# Altium PCB PowerModule.PcbDoc
Units mm, origin at the board's own origin, x right, y up, seen from the top; angles counter-clockwise.
Board outline 44.35 x 31.02 mm, 4 copper layers (Top Layer, GND, Power, Bottom Layer), stack 1.57 mm thick; 73 components, 36 nets, 299 pads, 922 vias.
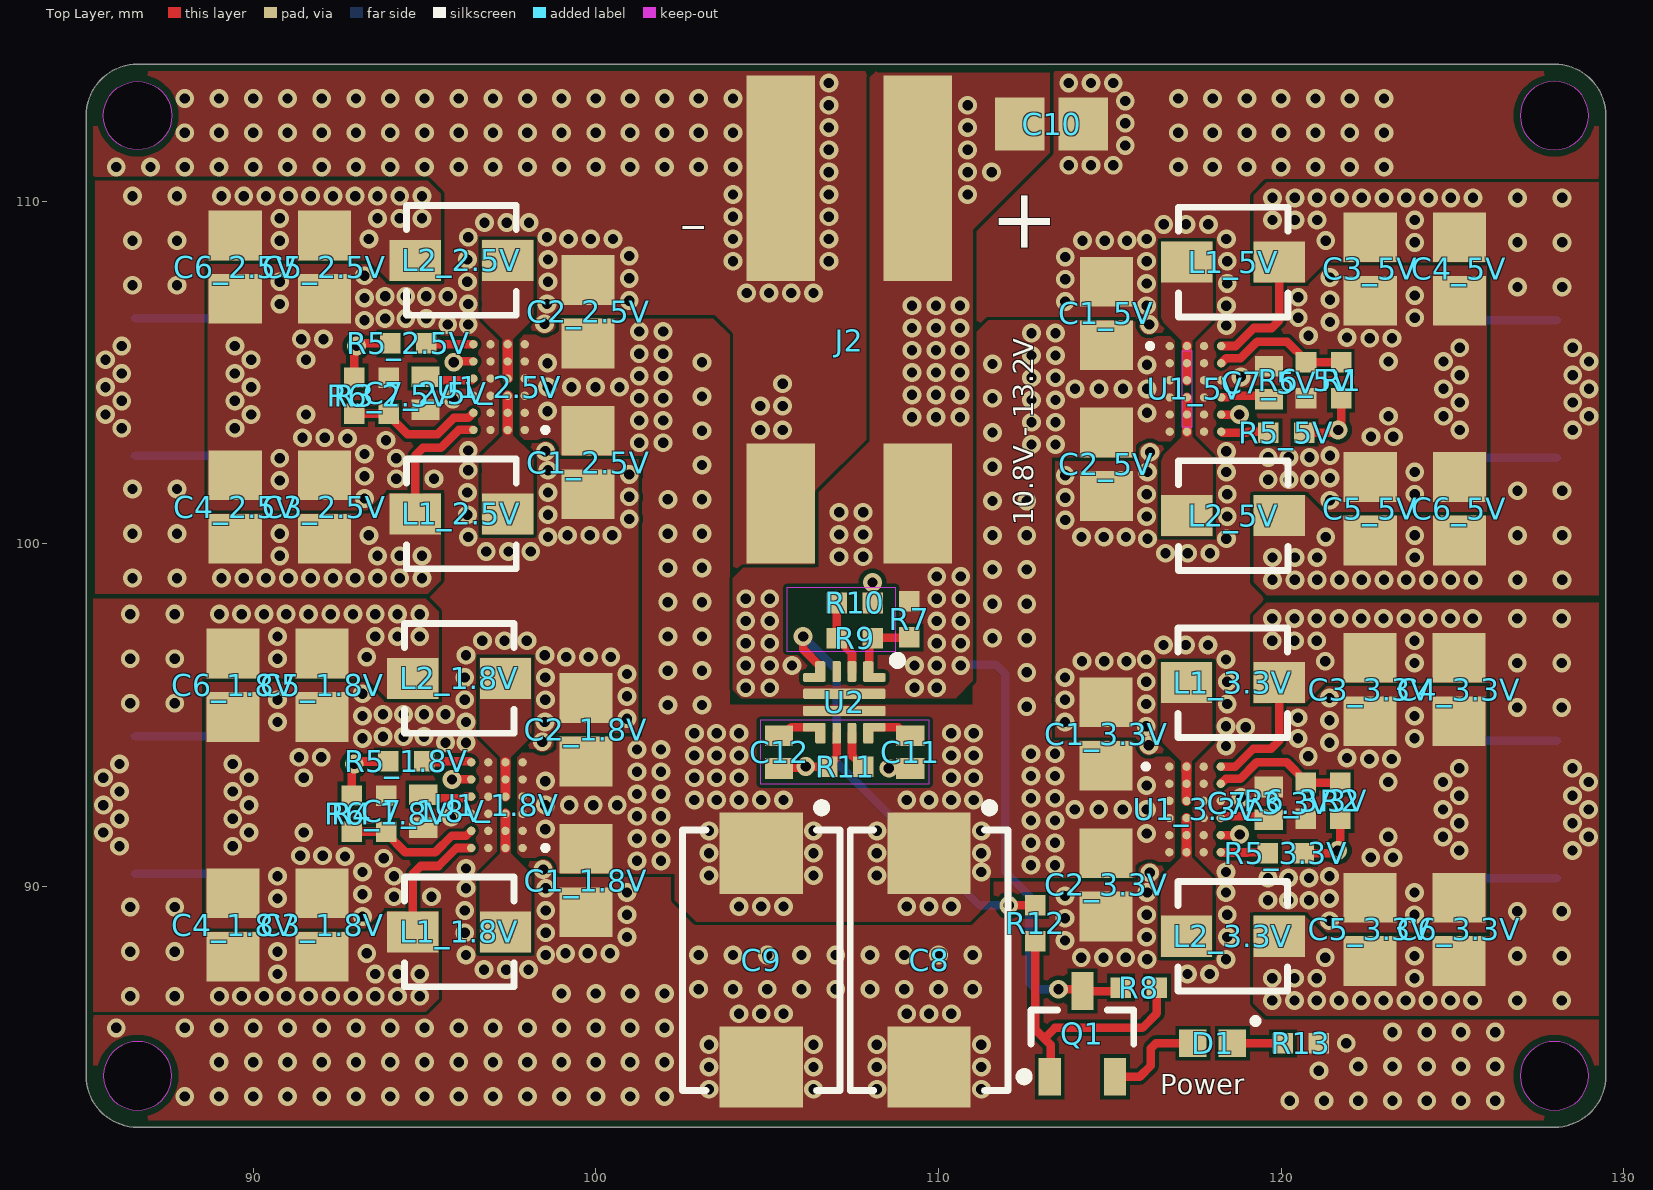
[diagram p0: Top Layer view]
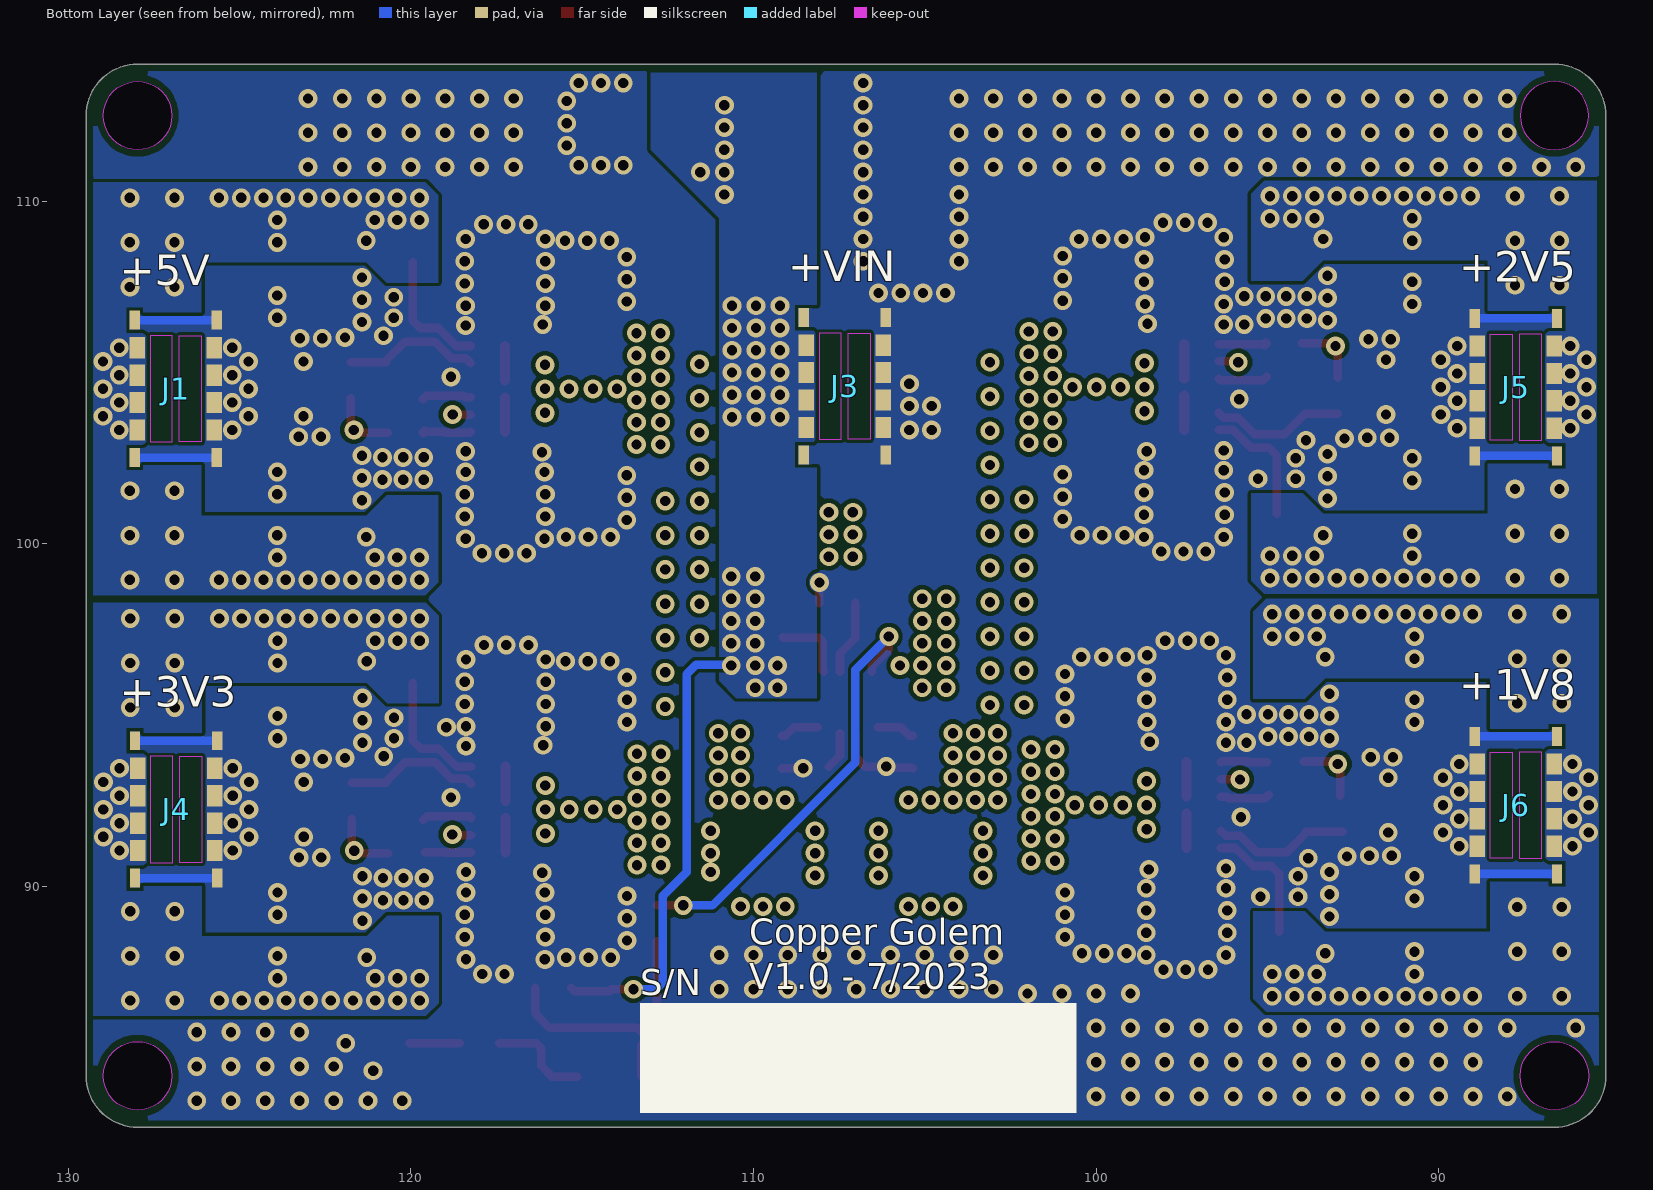
[diagram p1: Bottom Layer view, seen from below]
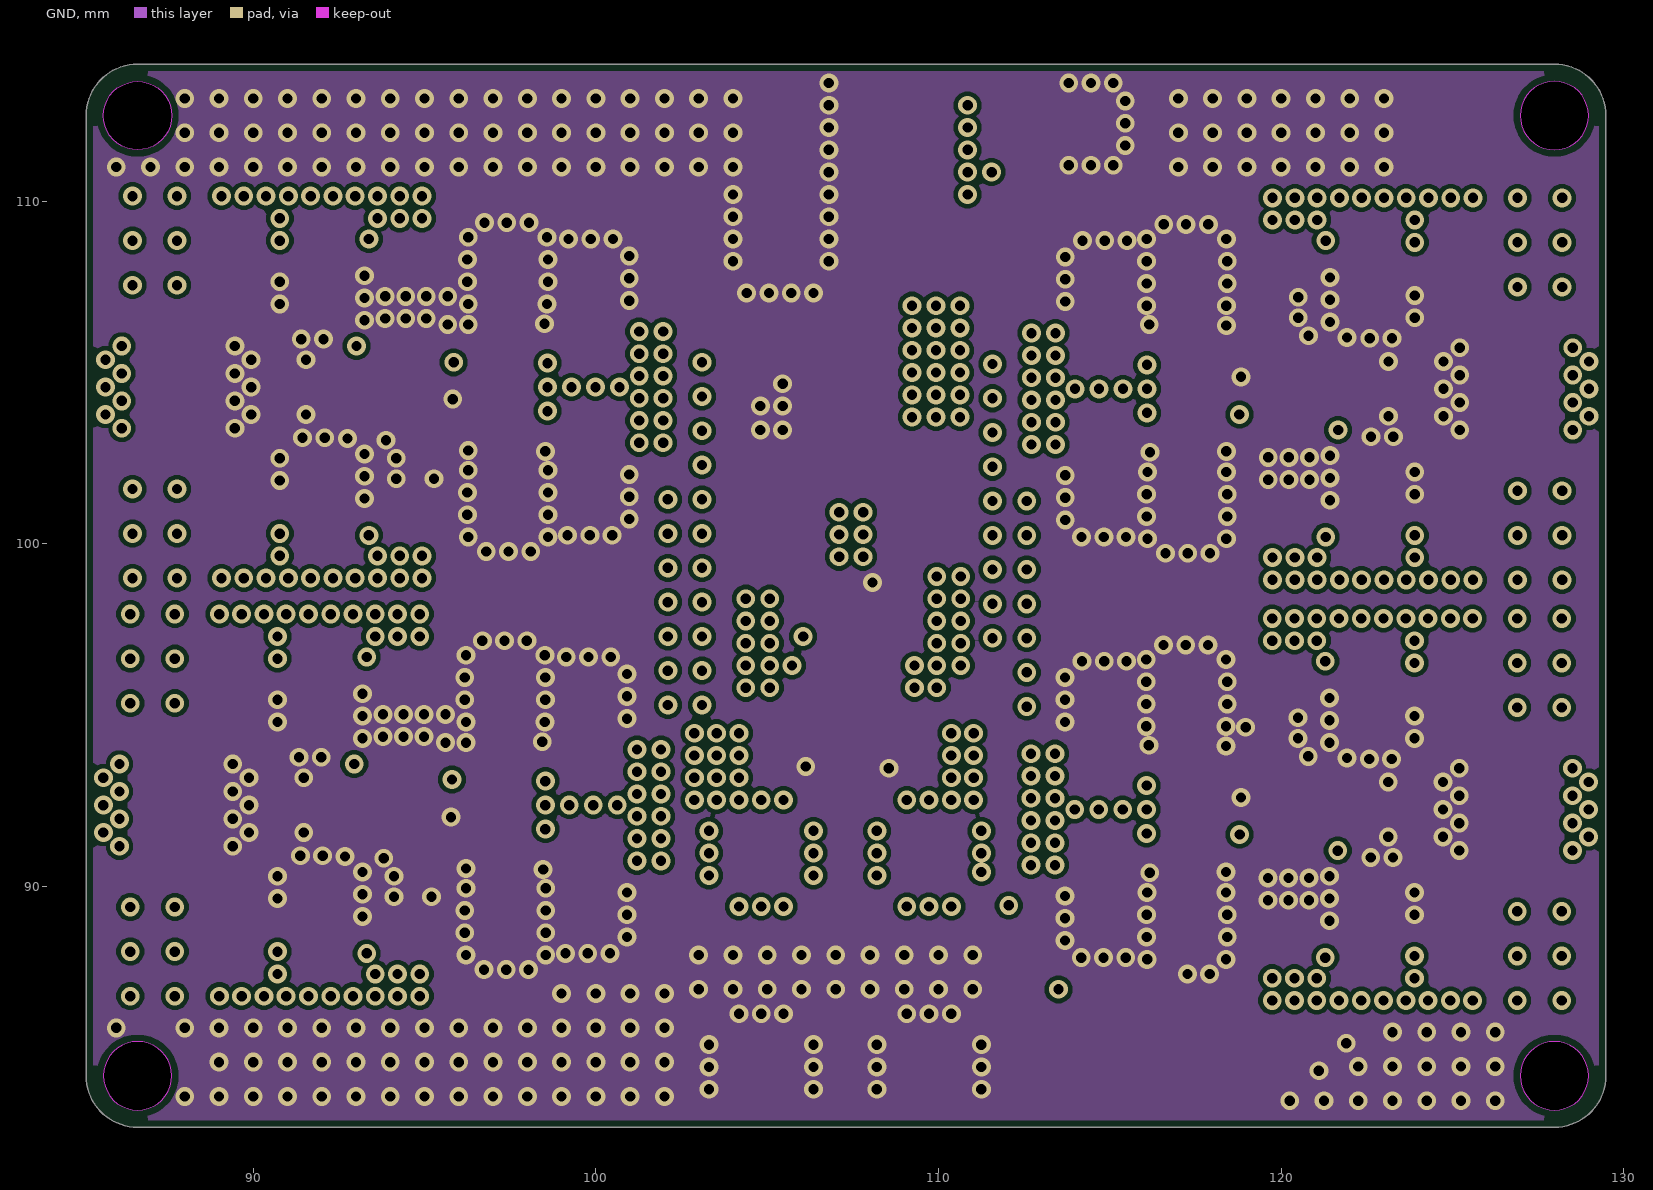
[diagram p2: GND]
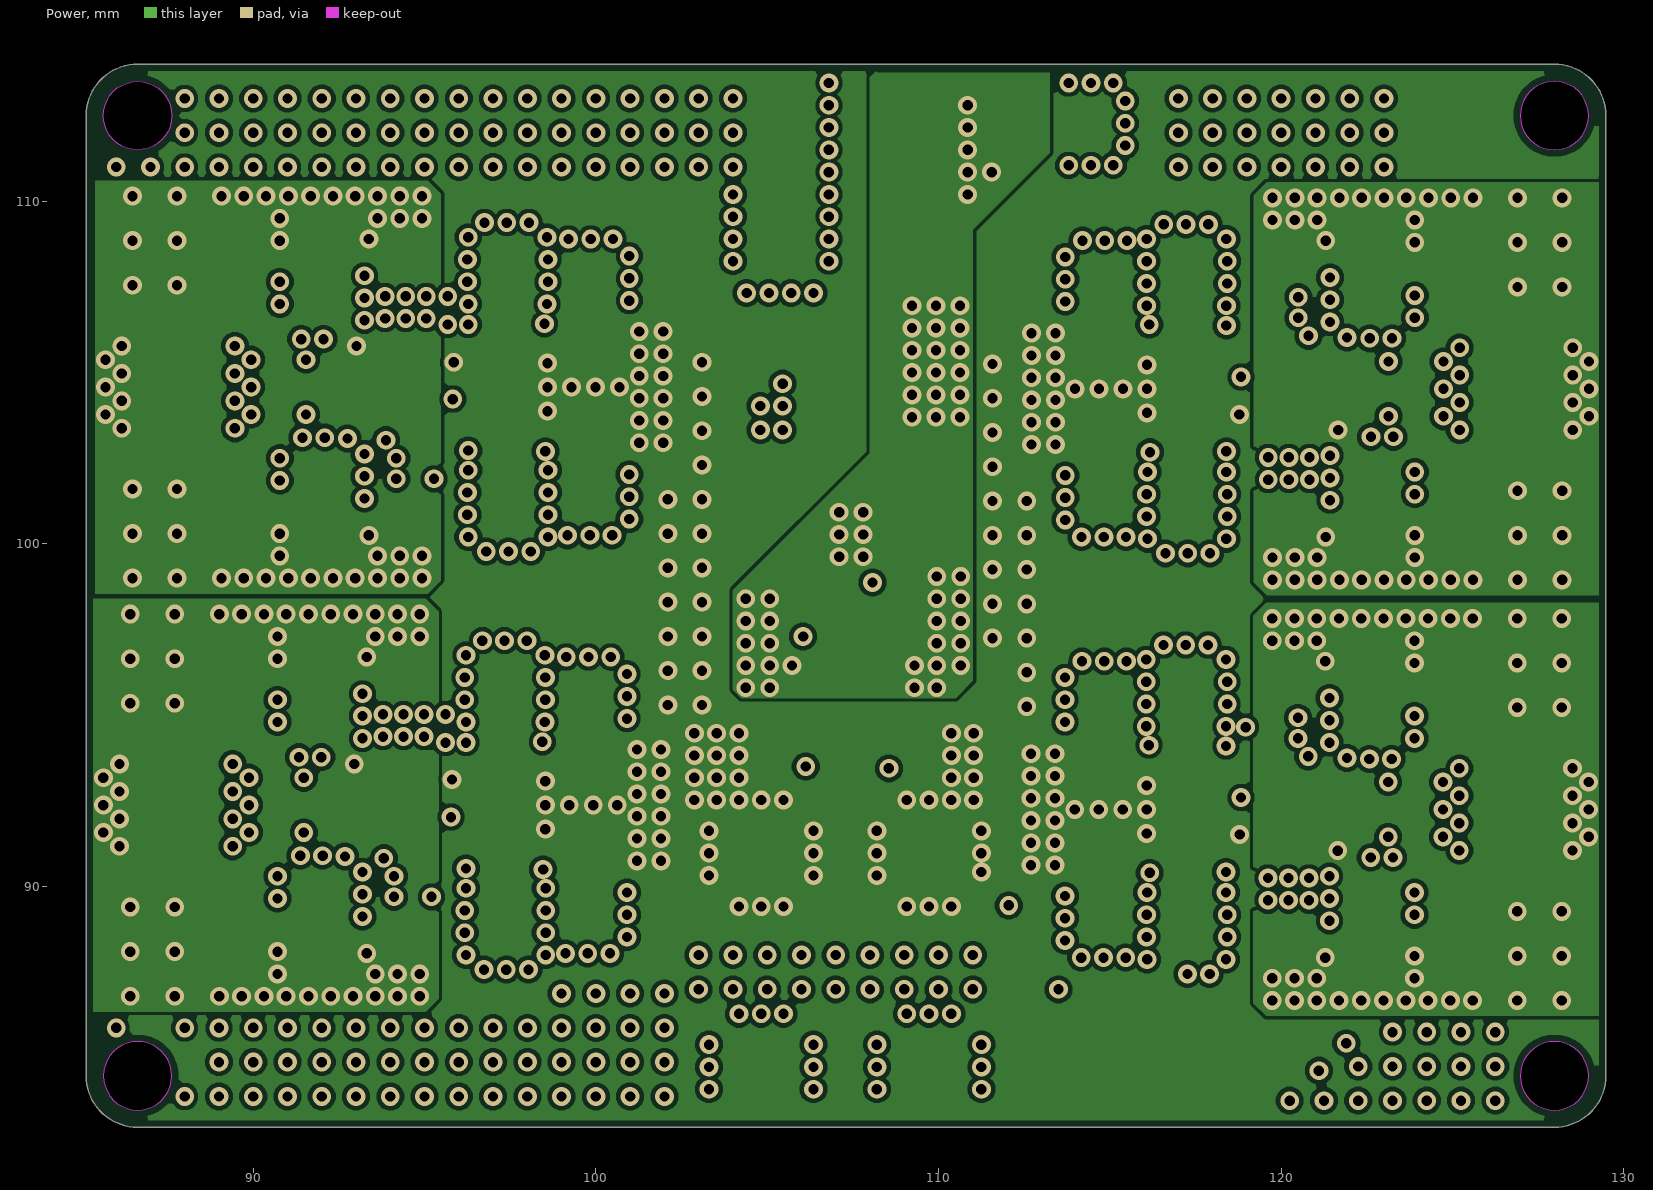
[diagram p3: Power]

## Layer stack, top to bottom
Top Solder: solder mask 0.0127, Solder Resist, Dk 3.8
Top Layer: signal copper 0.035
Dielectric 1: prepreg 0.1, 2313, Dk 4.05
GND: signal copper 0.0175
Core: core 1.265, FR-4, Dk 4.5
Power: signal copper 0.0175
Dielectric 2: prepreg 0.1, 2313, Dk 4.05
Bottom Layer: signal copper 0.035
Bottom Solder: solder mask 0.0127, Solder Resist, Dk 3.8

## Board outline
85.125,84.475 85.125,112.5 cw(c86.625,112.5) 86.625,114 127.975,114 cw(c127.975,112.5) 129.475,112.5 129.475,84.471 129.475,84.475 cw(c127.975,84.475) 127.975,82.975 86.625,82.975 cw(c86.625,84.475)
cut-out: 126.975,84.475 ccw(c127.975,84.475) 127.975,83.475 ccw(c127.975,84.475) 128.975,84.475 ccw(c127.975,84.475) 127.975,85.475 ccw(c127.975,84.475)
cut-out: 126.975,112.5 ccw(c127.975,112.5) 127.975,111.5 ccw(c127.975,112.5) 128.975,112.5 ccw(c127.975,112.5) 127.975,113.5 ccw(c127.975,112.5)
cut-out: 86.625,111.5 cw(c86.625,112.5) 85.625,112.5 cw(c86.625,112.5) 86.625,113.5 cw(c86.625,112.5) 87.625,112.5 cw(c86.625,112.5)
cut-out: 85.625,84.475 ccw(c86.625,84.475) 86.625,83.475 ccw(c86.625,84.475) 87.625,84.475 ccw(c86.625,84.475) 86.625,85.475 ccw(c86.625,84.475)

## Design rules (kind name [scope] priority, off if disabled: settings)
BoardOutlineClearance [All] p1: gap=0.2 ignorepadtopadclearanceinfootprint=FALSE
Clearance [All] p1: gap=0.102 ignorepadtopadclearanceinfootprint=FALSE except(0.127: Arc-Via Track-Via SMDPad-Via THPad-Via Via-Via Via-Fill Via-Poly Via-Region Via-Text; 0.25: Arc-Hole Track-Hole SMDPad-Hole THPad-Hole Via-Hole Fill-Hole Poly-Hole Region-Hole Text-Hole)
ComponentClearance [All] p1: gap=0.102 collisioncheckmode=3 verticalgap=0.102 showdistances=TRUE
DiffPairsRouting [All] p1: maxlimit=0.102 minlimit=0.102 mostfreqgap=0.102 toplayer_minwidth=0.102 toplayer_maxwidth=1816.048 toplayer_prefwidth=0.102 midlayer1_minwidth=0.102 midlayer1_maxwidth=1816.048 midlayer1_prefwidth=0.102 midlayer2_minwidth=0.102 midlayer2_maxwidth=1816.048 midlayer2_prefwidth=0.102 bottomlayer_minwidth=0.102 bottomlayer_maxwidth=1816.048 bottomlayer_prefwidth=0.102 maxuncoupledlength=12.7
Height [All] p1: minheight=0 maxheight=1816.048 prefheight=12.7
HoleSize [All] p1: absolutevalues=TRUE maxlimit=6.3 minlimit=0.2 maxpercent=80.000 minpercent=20.000
HoleToHoleClearance [All] p1: gap=0.25 allowstackedmicrovias=FALSE
MinimumAnnularRing [All] p1: minimumring=0.076
MinimumSolderMaskSliver [All] p1: minsoldermaskwidth=0
PlaneClearance [All] p1: clearance=0.102
PlaneConnect PlaneConnectPowerPads [InPadClass('PowerPads')] p1: planeconnectstyle=Direct reliefexpansion=0.508 reliefentries=4 reliefconductorwidth=0.254 reliefairgap=0.254
PlaneConnect [All] p2: pad.planeconnectstyle=Relief pad.reliefexpansion=0.3 pad.reliefentries=4 pad.reliefconductorwidth=0.102 pad.reliefairgap=0.102 via.planeconnectstyle=Direct via.reliefexpansion=0.3 via.reliefentries=4 via.reliefconductorwidth=0.127 via.reliefairgap=0.127
PolygonConnect PolygonConnectPowerPads [All vs (InPadClass('PowerPads'))] p1: connectstyle=Direct reliefconductorwidth=0.254 reliefentries=4 polygonreliefangle="90 Angle" airgapwidth=0.254
PolygonConnect [All] p2: thpad.connectstyle=Relief thpad.reliefconductorwidth=0.102 thpad.reliefentries=4 thpad.polygonreliefangle="90 Angle" thpad.airgapwidth=0.102 smdpad.connectstyle=Direct smdpad.reliefconductorwidth=0.102 smdpad.reliefentries=4 smdpad.polygonreliefangle="90 Angle" smdpad.airgapwidth=0.102 via.connectstyle=Direct via.reliefconductorwidth=0.127 via.reliefentries=4 via.polygonreliefangle="90 Angle" via.airgapwidth=0.127
RoomDefinition 5V [InComponentClass('5V')] p1: confinementstyle=ConfineIn formatcopy=TRUE lockcomponents=FALSE outline 111.825,98.725 126.65,98.725 126.65,110.325 111.825,110.325
RoomDefinition 1.8V [InComponentClass('1.8V')] p2: confinementstyle=ConfineIn formatcopy=TRUE lockcomponents=FALSE outline 102.3,98.175 87.961,98.175 87.961,86.575 102.3,86.575
RoomDefinition 2.5V [InComponentClass('2.5V')] p3: confinementstyle=ConfineIn formatcopy=TRUE lockcomponents=FALSE outline 102.364,110.375 88.025,110.375 88.025,98.775 102.364,98.775
RoomDefinition 3.3V [InComponentClass('3.3V')] p4: confinementstyle=ConfineIn formatcopy=TRUE lockcomponents=FALSE outline 112.15,86.45 126.639,86.45 126.639,98.05 112.15,98.05
RoutingVias [All] p1: holewidth=0.2 width=0.45 viastyle="Through Hole" minholewidth=0.2 minwidth=0.45 maxholewidth=6.3 maxwidth=6.55
SilkToSilkClearance [All] p1: silktosilkclearance=0
SilkToSolderMaskClearance [IsPad] p1: minsilkscreentomaskgap=0.102 clearancetoexposedcopper=TRUE
SolderMaskExpansion [All] p1: expansion=0.075 istentingtop=FALSE
Width [All] p1: maxlimit=1816.048 minlimit=0.102 preferedwidth=0.102
20 further rules are at their usual default settings.

## Classes and differential pairs
channel class "04 REGULATORS": 1.8V 2.5V 3.3V 5V
component class 5V: C1_5V C2_5V C3_5V C4_5V C5_5V C6_5V C7_5V L1_5V L2_5V R5_5V R6_5V U1_5V
component class "03 TOPOLOGY": C8 C9 C10 C11 C12 D1 J1 J2 J3 J4 J5 J6 Q1 R1 R2 R3 R4 R7 R8 R9 R10 R11 R12 R13 U2
component class 3.3V: C1_3.3V C2_3.3V C3_3.3V C4_3.3V C5_3.3V C6_3.3V C7_3.3V L1_3.3V L2_3.3V R5_3.3V R6_3.3V U1_3.3V
component class 2.5V: C1_2.5V C2_2.5V C3_2.5V C4_2.5V C5_2.5V C6_2.5V C7_2.5V L1_2.5V L2_2.5V R5_2.5V R6_2.5V U1_2.5V
component class 1.8V: C1_1.8V C2_1.8V C3_1.8V C4_1.8V C5_1.8V C6_1.8V C7_1.8V L1_1.8V L2_1.8V R5_1.8V R6_1.8V U1_1.8V

## Components (designator, comment, footprint, x,y, rotation, side; value= is the part's Value field where it differs from the comment)
C1_1.8V "22uF/25V" CAPC2012X14M 99.711,90.175 r90 top (schematic designator C1)
C1_2.5V "22uF/25V" CAPC2012X14M 99.775,102.375 r90 top (schematic designator C1)
C1_3.3V "22uF/25V" CAPC2012X14M 114.889,94.45 r270 top (schematic designator C1)
C1_5V "22uF/25V" CAPC2012X14M 114.9,106.725 r270 top (schematic designator C1)
C2_1.8V "22uF/25V" CAPC2012X14M 99.711,94.575 r270 top (schematic designator C2)
C2_2.5V "22uF/25V" CAPC2012X14M 99.775,106.775 r270 top (schematic designator C2)
C2_3.3V "22uF/25V" CAPC2012X14M 114.889,90.05 r90 top (schematic designator C2)
C2_5V "22uF/25V" CAPC2012X14M 114.9,102.325 r90 top (schematic designator C2)
C3_1.8V "47uF/6.3V" CAPC2012X14M 92.011,88.875 r270 top (schematic designator C3)
C3_2.5V "47uF/6.3V" CAPC2012X14M 92.075,101.075 r270 top (schematic designator C3)
C3_3.3V "47uF/6.3V" CAPC2012X14M 122.589,95.75 r90 top (schematic designator C3)
C3_5V "47uF/6.3V" CAPC2012X14M 122.6,108.025 r90 top (schematic designator C3)
C4_1.8V "47uF/6.3V" CAPC2012X14M 89.411,88.875 r270 top (schematic designator C4)
C4_2.5V "47uF/6.3V" CAPC2012X14M 89.475,101.075 r270 top (schematic designator C4)
C4_3.3V "47uF/6.3V" CAPC2012X14M 125.189,95.75 r90 top (schematic designator C4)
C4_5V "47uF/6.3V" CAPC2012X14M 125.2,108.025 r90 top (schematic designator C4)
C5_1.8V "47uF/6.3V" CAPC2012X14M 92.011,95.875 r90 top (schematic designator C5)
C5_2.5V "47uF/6.3V" CAPC2012X14M 92.075,108.075 r90 top (schematic designator C5)
C5_3.3V "47uF/6.3V" CAPC2012X14M 122.589,88.75 r270 top (schematic designator C5)
C5_5V "47uF/6.3V" CAPC2012X14M 122.6,101.025 r270 top (schematic designator C5)
C6_1.8V "47uF/6.3V" CAPC2012X14M 89.411,95.875 r90 top (schematic designator C6)
C6_2.5V "47uF/6.3V" CAPC2012X14M 89.475,108.075 r90 top (schematic designator C6)
C6_3.3V "47uF/6.3V" CAPC2012X14M 125.189,88.75 r270 top (schematic designator C6)
C6_5V "47uF/6.3V" CAPC2012X14M 125.2,101.025 r270 top (schematic designator C6)
C7_1.8V "2.7nF/25V" CAPC1005X07M 94.961,92.2 r90 top (schematic designator C7)
C7_2.5V "2.7nF/25V" CAPC1005X07M 95.025,104.4 r90 top (schematic designator C7)
C7_3.3V "2.7nF/25V" CAPC1005X07M 119.639,92.425 r270 top (schematic designator C7)
C7_5V "2.7nF/25V" CAPC1005X07M 119.65,104.7 r270 top (schematic designator C7)
C8 "220uF/16V" TANTAL/2917 109.725,87.85 r270 top
C9 "220uF/16V" TANTAL/2917 104.825,87.85 r270 top
C10 "22uF/25V" CAPC2012X14M 113.3,112.25 r180 top
C11 "1.3nF/50V" CAPC1005X07M 109.175,93.925 r90 top
C12 "5.6nF/16V" CAPC1005X07M 105.35,93.925 r90 top
D1 "LTST-C191KGKT" LED-0603 118,85.425 r180 top
J1 "2074190081" 2074190081 126.861,104.525 r180 bottom
J2 "2060-452/998-404" 2060-452/998-404 109.4,110.675 r180 top
J3 "2074190081" 2074190081 107.337,104.6 r180 bottom
J4 "2074190081" 2074190081 126.85,92.25 r180 bottom
J5 "2074190081" 2074190081 87.75,104.575 r0 bottom
J6 "2074190081" 2074190081 87.75,92.375 r0 bottom
L1_1.8V "1uH/24mOhm" INDP3030X20M 96.011,88.675 r180 top (schematic designator L1)
L1_2.5V "1uH/24mOhm" INDP3030X20M 96.075,100.875 r180 top (schematic designator L1)
L1_3.3V "1uH/24mOhm" INDP3030X20M 118.589,95.95 r0 top (schematic designator L1)
L1_5V "1uH/24mOhm" INDP3030X20M 118.6,108.225 r0 top (schematic designator L1)
L2_1.8V "1uH/24mOhm" INDP3030X20M 96.011,96.075 r180 top (schematic designator L2)
L2_2.5V "1uH/24mOhm" INDP3030X20M 96.075,108.275 r180 top (schematic designator L2)
L2_3.3V "1uH/24mOhm" INDP3030X20M 118.589,88.55 r0 top (schematic designator L2)
L2_5V "1uH/24mOhm" INDP3030X20M 118.6,100.825 r0 top (schematic designator L2)
Q1 "BSS84AK,215" SOT95P230X110-3M 114.2,85.7 r90 top
R1 "787k/1%" RESC1005X04M 121.75,104.775 r270 top
R2 "470k/1%" RESC1005X04M 121.725,92.5 r270 top
R3 "316k/1%" RESC1005X04M 92.95,104.325 r90 top
R4 "187k/1%" RESC1005X04M 92.875,92.125 r90 top
R5_1.8V "470k/1%" RESC1005X04M 94.461,93.65 r180 top (schematic designator R5)
R5_2.5V "470k/1%" RESC1005X04M 94.525,105.85 r180 top (schematic designator R5)
R5_3.3V "470k/1%" RESC1005X04M 120.139,90.975 r0 top (schematic designator R5)
R5_5V "470k/1%" RESC1005X04M 120.15,103.25 r0 top (schematic designator R5)
R6_1.8V "150k/1%" RESC1005X04M 93.886,92.125 r270 top (schematic designator R6)
R6_2.5V "150k/1%" RESC1005X04M 93.95,104.325 r270 top (schematic designator R6)
R6_3.3V "150k/1%" RESC1005X04M 120.714,92.5 r90 top (schematic designator R6)
R6_5V "150k/1%" RESC1005X04M 120.725,104.775 r90 top (schematic designator R6)
R7 "470k/1%" RESC1005X04M 109.15,97.8 r90 top
R8 "11k/1%" RESC1005X04M 115.85,87.05 r180 top
R9 "11k/1%" RESC1005X04M 107.55,97.25 r0 top
R10 "47k/1%" RESC1005X04M 107.55,98.275 r180 top
R11 "750/1%" RESC1005X04M 107.275,93.5 r0 top
R12 "750/1%" RESC1005X04M 112.825,88.925 r270 top
R13 "750/1%" RESC1005X04M 120.575,85.425 r180 top
U1_1.8V "TPS62180YZFT" BGA24C50P4X6_210X310X62 97.111,92.375 r180 top (schematic designator U1)
U1_2.5V "TPS62180YZFT" BGA24C50P4X6_210X310X62 97.175,104.575 r180 top (schematic designator U1)
U1_3.3V "TPS62180YZFT" BGA24C50P4X6_210X310X62 117.489,92.25 r0 top (schematic designator U1)
U1_5V "TPS62180YZFT" BGA24C50P4X6_210X310X62 117.5,104.525 r0 top (schematic designator U1)
U2 "TPS25970ARPWR" QFN45P200X200X100-16L 107.25,95.375 r270 top

## Footprints (in the part's own frame and the unit in brackets; to place one, negate y for a bottom-side part, rotate by r counter-clockwise, add the part's x,y. Pads: shape width x height; smd on the part's side, far side on the other; paste and mask are expansions set on the pad)
2060-452/998-404 [mm] "Connector"
  rect 2x3.5 smd mask+0.05: 1(0,9.5) 2(4,9.5)
  rect 2x6 smd mask+0.05: 1(0,0) 2(4,0)
  body extent -1.9,-2.35 6,10.75, height 4.51
2074190081 [mm] "Connector"
  rect 0.45x0.62 smd mask+0.05: 1(1.125,1.2) 2(1.125,0.4) 3(1.125,-0.4) 4(1.125,-1.2) 5(-1.125,1.2) 6(-1.125,0.4) 7(-1.125,-0.4) 8(-1.125,-1.2)
  rect 0.3x0.55 smd mask+0.05: SHLD(-1.2,-2.005) SHLD(-1.2,2.005) SHLD(1.2,-2.005) SHLD(1.2,2.005)
  Top Layer keep-out region: -0.1,1.55 -0.75,1.55 -0.75,-1.55 -0.1,-1.55
  Top Layer keep-out region: 0.1,1.55 0.75,1.55 0.75,-1.55 0.1,-1.55
  body extent -1.25,-2.6 1.25,2.6, height 0.74
BGA24C50P4X6_210X310X62 [mm] "BGA, 24-Leads, Body 2.10x3.10mmx0.63mm, Pitch 0.50mm"
  round 0.245 smd paste-2539.97 mask+0.05: A1(-0.75,1.25) A2(-0.25,1.25) A3(0.25,1.25) A4(0.75,1.25) B1(-0.75,0.75) B2(-0.25,0.75) B3(0.25,0.75) B4(0.75,0.75) C1(-0.75,0.25) C2(-0.25,0.25) C3(0.25,0.25) C4(0.75,0.25) D1(-0.75,-0.25) D2(-0.25,-0.25) D3(0.25,-0.25) D4(0.75,-0.25) E1(-0.75,-0.75) E2(-0.25,-0.75) E3(0.25,-0.75) E4(0.75,-0.75) F1(-0.75,-1.25) F2(-0.25,-1.25) F3(0.25,-1.25) F4(0.75,-1.25)
  silkscreen extent -1.46,1.2 -1.36,1.3, body extent -1.05,-1.55 1.05,1.55, height 0.63
CAPC1005X07M [mm] "Chip Capacitor, 2-Leads, Body 1.00x0.50mm, IPC Low Density"
  rect 0.6x0.82 smd: 1(-0.48,0) 2(0.48,0)
  body extent -0.6,-0.35 0.6,0.35, height 0.7
CAPC2012X14M [mm] "Chip Capacitor, 2-Leads, Body 2.00x1.25mm, IPC Low Density"
  rect 1.45x1.55 smd: 1(-0.925,0) 2(0.925,0)
  body extent -1.1,-0.72 1.1,0.72, height 1.45
INDP3030X20M [mm] "Precision Wire Wound Inductor, 2-Leads, Body 3.00x3.00mm, IPC Low Density"
  rect 1.5x1.2 smd: 1(-1.35,0) 2(1.35,0)
  silkscreen extent -1.6,-1.6 1.6,1.6, body extent -1.8,-1.6 1.8,1.6, height 2.06
LED-0603 [mm] "0603"
  rect 0.8x0.8 smd: 1(-0.575,0) 2(0.575,0)
  silkscreen extent -1.3,-0.7 -1.2,-0.6, body extent -0.8,-0.4 0.8,0.4, height 0.56
QFN45P200X200X100-16L [mm] "QFN, 16-Leads, Body 2.00x2.00mm, Pitch 0.45mm, IPC High Density"
  rrect25% 0.6x0.3 smd paste-0.009 mask+0.05: 1(-0.9,0.7) 4(-0.9,-0.7) 7(0.9,-0.7) 10(0.9,0.7)
  rrect25% 0.25x0.65 smd paste-0.009 mask+0.05: 1(-0.725,0.875) 4(-0.725,-0.875) 7(0.725,-0.875) 10(0.725,0.875)
  rrect25% 0.6x0.25 smd mask+0.05: 2(-0.9,0.225) 3(-0.9,-0.225) 8(0.9,-0.225) 9(0.9,0.225)
  rrect25% 0.3x2.4 smd paste-2539.97 mask+0.05: 5(-0.25,0) 6(0.25,0)
  silkscreen extent -1.35,1.43 -1.1,1.67, body extent -1,-1 1,1, height 1
RESC1005X04M [mm] "Chip Resistor, 2-Leads, Body 1.00x0.50mm, IPC Low Density"
  rect 0.6x0.6 smd: 1(-0.525,0) 2(0.525,0)
  body extent -0.53,-0.28 0.53,0.27, height 0.4
SOT95P230X110-3M [mm] "SOT23, 3-Leads, Body 2.90x2.30mm, Pitch 0.95mm, IPC Low Density"
  rect 1.1x0.65 smd mask+0.05: 1(-1.25,0.95) 2(-1.25,-0.95) 3(1.25,0)
  silkscreen extent -1.37,-1.5 0.7,1.82, body extent -1.52,-1.5 1.32,1.5, height 1.2
TANTAL/2917 [mm] "SODFL, 2-Leads, Body 4.30x7.60mm, IPC Medium Density"
  rect 2.37x2.43 smd: 1(-3.12,0) 2(3.12,0)
  silkscreen extent -4.57,-2.3 3.8,2.3, body extent -3.65,-2.15 3.65,2.15, height 3.11

## Part data
C1_1.8V C1_2.5V C1_3.3V C1_5V C2_1.8V C2_2.5V C2_3.3V C2_5V C10: library part GRT21BR61E226ME13L, "22 µF ±20% 25V Ceramic Capacitor X5R 0805 (2012 Metric)", ComponentLink1Description=Datasheet, ComponentLink1URL=https://search.murata.co.jp/Ceramy/image/img/A01X/G101/ENG/GRT21BR61E226ME13-01.pdf, MPN=GRT21BR61E226ME13L
C3_1.8V C3_2.5V C3_3.3V C3_5V C4_1.8V C4_2.5V C4_3.3V C4_5V C5_1.8V C5_2.5V C5_3.3V C5_5V C6_1.8V C6_2.5V C6_3.3V C6_5V: library part GRM188R60J476ME15D, "47 µF ±20% 6.3V Ceramic Capacitor X5R 0603 (1608 Metric)", ComponentLink1Description=Datasheet, ComponentLink1URL=https://search.murata.co.jp/Ceramy/image/img/A01X/G101/ENG/GRM188R60J476ME15-01.pdf, MPN=GRM188R60J476ME15D
C7_1.8V C7_2.5V C7_3.3V C7_5V: library part CC0402KRX7R8BB272, "2700 pF ±10% 25V Ceramic Capacitor X7R 0402 (1005 Metric)", ComponentLink1Description=Datasheet, ComponentLink1URL=https://www.yageo.com/upload/media/product/productsearch/datasheet/mlcc/UPY-GPHC_X7R_6.3V-to-250V_23.pdf, MPN=CC0402KRX7R8BB272
C8 C9: library part T491D227K016AT, "220 µF Molded Tantalum Capacitors 16 V 2917 (7343 Metric) 500mOhm", ComponentLink1Description=Datasheet, ComponentLink1URL=https://connect.kemet.com:7667/gateway/IntelliData-ComponentDocumentation/1.0/download/datasheet/T491D227K016AT, MPN=T491D227K016AT
C11: library part C0402C132J5GAC7867, "1300 pF ±5% 50V Ceramic Capacitor C0G, NP0 0402 (1005 Metric)", ComponentLink1Description=Datasheet, ComponentLink1URL=https://connect.kemet.com:7667/gateway/IntelliData-ComponentDocumentation/1.0/download/datasheet/C0402C132J5GAC7867, MPN=C0402C132J5GAC7867
C12: library part CC0402KRX7R7BB562, "5600 pF ±10% 16V Ceramic Capacitor X7R 0402 (1005 Metric)", ComponentLink1Description=Datasheet, ComponentLink1URL=https://www.yageo.com/upload/media/product/productsearch/datasheet/mlcc/UPY-GPHC_X7R_6.3V-to-250V_23.pdf, MPN=CC0402KRX7R7BB562
D1: "Green 571nm LED Indication - Discrete 2V 0603 (1608 Metric)", ComponentLink1Description=Datasheet, ComponentLink1URL=https://optoelectronics.liteon.com/upload/download/DS22-2000-228/LTST-C191KGKT.PDF, MPN=LTST-C191KGKT
J1 J3 J4 J5 J6: "8 (4 + 4 Power) Position Connector Receptacle, Center Strip Contacts Surface Mount Gold", ComponentLink1Description=Datasheet, ComponentLink1URL=https://www.molex.com/pdm_docs/sd/2074190081_sd.pdf, MPN=2074190081
J2: "2 Position Wire to Board Terminal Block Horizontal with Board 0.157\" (4.00mm) Surface Mount", ComponentLink1Description=Datasheet, ComponentLink1URL=https://www.wago.com/global/products/datasheets/Datasheet.pdf?product=2060-452/998-404&lang=en, MPN=2060-452/998-404
L1_1.8V L1_2.5V L1_3.3V L1_5V L2_1.8V L2_2.5V L2_3.3V L2_5V: library part IHLP1212BZER1R0M11, "1 µH Shielded Molded Inductor 5 A 24mOhm Max Nonstandard", ComponentLink1Description=Datasheet, ComponentLink1URL=https://www.vishay.com/docs/34289/lp12bz11.pdf, MPN=IHLP1212BZER1R0M11
Q1: "P-Channel 50 V 180mA (Ta) 350mW (Ta), 1.14W (Tc) Surface Mount TO-236AB", ComponentLink1Description=Datasheet, ComponentLink1URL=https://assets.nexperia.com/documents/data-sheet/BSS84AK.pdf, MPN=BSS84AK,215
R1: library part CRCW0402787KFKED, "787 kOhms ±1% 0.063W, 1/16W Chip Resistor 0402 (1005 Metric) Automotive AEC-Q200 Thick Film", ComponentLink1Description=Datasheet, ComponentLink1URL=https://www.vishay.com/docs/20035/dcrcwe3.pdf, MPN=CRCW0402787KFKED
R2 R5_1.8V R5_2.5V R5_3.3V R5_5V R7: library part CRCW0402787KFKED_1RMCF0402FT470K, "470 kOhms ±1% 0.063W, 1/16W Chip Resistor 0402 (1005 Metric) Automotive AEC-Q200 Thick Film", MPN=RMCF0402FT470K, ComponentLink1Description=Datasheet, ComponentLink1URL=https://www.seielect.com/Catalog/SEI-RMCF_RMCP.pdf
R3: library part CRCW0402316KFKED, "316 kOhms ±1% 0.063W, 1/16W Chip Resistor 0402 (1005 Metric) Automotive AEC-Q200 Thick Film", ComponentLink1Description=Datasheet, ComponentLink1URL=https://www.vishay.com/docs/20035/dcrcwe3.pdf, MPN=CRCW0402316KFKED
R4: library part CRCW0402187KFKED, "187 kOhms ±1% 0.063W, 1/16W Chip Resistor 0402 (1005 Metric) Automotive AEC-Q200 Thick Film", ComponentLink1Description=Datasheet, ComponentLink1URL=https://www.vishay.com/docs/20035/dcrcwe3.pdf, MPN=CRCW0402187KFKED
R6_1.8V R6_2.5V R6_3.3V R6_5V: library part CRCW0402150KFKED, "150 kOhms ±1% 0.063W, 1/16W Chip Resistor 0402 (1005 Metric) Automotive AEC-Q200 Thick Film", ComponentLink1Description=Datasheet, ComponentLink1URL=https://www.vishay.com/docs/20035/dcrcwe3.pdf, MPN=CRCW0402150KFKED
R8 R9: library part RC0402FR-0711KL, "11 kOhms ±1% 0.063W, 1/16W Chip Resistor 0402 (1005 Metric) Moisture Resistant Thick Film", ComponentLink1Description=Datasheet, ComponentLink1URL=https://www.yageo.com/upload/media/product/productsearch/datasheet/rchip/PYu-RC_Group_51_RoHS_L_12.pdf, MPN=RC0402FR-0711KL
R10: library part ERJ-2RKF4702X, "47 kOhms ±1% 0.1W, 1/10W Chip Resistor 0402 (1005 Metric) Automotive AEC-Q200 Thick Film", ComponentLink1Description=Datasheet, ComponentLink1URL=https://industrial.panasonic.com/cdbs/www-data/pdf/RDA0000/AOA0000C304.pdf, MPN=ERJ-2RKF4702X
R11 R12 R13: library part RC0402FR-07750RL, "750 Ohms ±1% 0.063W, 1/16W Chip Resistor 0402 (1005 Metric) Moisture Resistant Thick Film", ComponentLink1Description=Datasheet, ComponentLink1URL=https://www.yageo.com/upload/media/product/productsearch/datasheet/rchip/PYu-RC_Group_51_RoHS_L_12.pdf, MPN=RC0402FR-07750RL
U1_1.8V U1_2.5V U1_3.3V U1_5V: "Buck Switching Regulator IC Positive Adjustable 0.9V 1 Output 6A 24-UFBGA, DSBGA", ComponentLink1Description=Datasheet, ComponentLink1URL=https://www.ti.com/general/docs/suppproductinfo.tsp?distId=10&gotoUrl=https%3A%2F%2Fwww.ti.com%2Flit%2Fgpn%2Ftps62180, MPN=TPS62180YZFT
U2: "2.7-V TO 23-V, 10-MOHM, 7-A EFUS", ComponentLink1Description=Datasheet, ComponentLink1URL=https://www.ti.com/lit/ds/symlink/tps2597.pdf?ts=1689264287849&ref_url=https%253A%252F%252Fwww.google.com%252F, MPN=TPS25970ARPWR

## Via types
v1: diameter 0.55, hole 0.3, Top Layer to Bottom Layer, tented both sides, 922 vias

## Nets (pads, with @x,y where several pads share a name; then routed paths per layer and width w, separated by ;. In a path a pad name is that pad's centre, name@x,y a point inside that pad or via, vN(x,y) a via of type N, cw(c..) or ccw(c..) an arc to the next point about the centre after c; other vN are vias at no path point)
+1V8: C3_1.8V.2 C4_1.8V.2 C5_1.8V.2 C6_1.8V.2 J6.5 J6.6 J6.7 J6.8 L1_1.8V.2 L2_1.8V.2 R4.2 R5_1.8V.2 U1_1.8V.A4 | length 5.7
  Top Layer w0.25: R4.2 92.875,93.504 93.021,93.65 93.922,93.65 93.929,93.643 R5_1.8V.2 ; L1_1.8V.2 94.661,90.375 94.886,90.6 95.411,90.6 95.936,91.125 U1_1.8V.A4
  other v1: 86.411,86.8 87.711,86.8 89.011,86.8 89.661,86.8 90.311,86.8 90.961,86.8 91.611,86.8 92.261,86.8 92.911,86.8 93.561,86.8 94.211,86.8 94.861,86.8 90.711,87.45 93.561,87.45 94.211,87.45 94.861,87.45 93.311,88.05 86.411,88.1 87.711,88.1 90.711,88.1 86.411,89.4 87.711,89.4 86.1,91.175 85.625,91.575 86.1,91.975 85.625,92.375 86.1,92.775 85.625,93.175 86.1,93.575 92.948,93.577 86.411,95.35 87.711,95.35 86.411,96.65 87.711,96.65 90.711,96.65 93.311,96.7 90.711,97.3 93.561,97.3 94.211,97.3 94.861,97.3 86.411,97.95 87.711,97.95 89.011,97.95 89.661,97.95 90.311,97.95 90.961,97.95 91.611,97.95 92.261,97.95 92.911,97.95 93.561,97.95 94.211,97.95 94.861,97.95
+2V5: C3_2.5V.2 C4_2.5V.2 C5_2.5V.2 C6_2.5V.2 J5.5 J5.6 J5.7 J5.8 L1_2.5V.2 L2_2.5V.2 R3.2 R5_2.5V.2 U1_2.5V.A4 | length 5.7
  Top Layer w0.25: R3.2 92.95,105.7 93.1,105.85 R5_2.5V.2 ; L1_2.5V.2 94.725,102.575 94.95,102.8 95.475,102.8 96,103.325 U1_2.5V.A4
  other v1: 86.475,99 87.775,99 89.075,99 89.725,99 90.375,99 91.025,99 91.675,99 92.325,99 92.975,99 93.625,99 94.275,99 94.925,99 90.775,99.65 93.625,99.65 94.275,99.65 94.925,99.65 93.375,100.25 86.475,100.3 87.775,100.3 90.775,100.3 86.475,101.6 87.775,101.6 86.164,103.375 85.689,103.775 86.164,104.175 85.689,104.575 86.164,104.975 85.689,105.375 86.164,105.775 93.012,105.777 86.475,107.55 87.775,107.55 86.475,108.85 87.775,108.85 90.775,108.85 93.375,108.9 90.775,109.5 93.625,109.5 94.275,109.5 94.925,109.5 86.475,110.15 87.775,110.15 89.075,110.15 89.725,110.15 90.375,110.15 91.025,110.15 91.675,110.15 92.325,110.15 92.975,110.15 93.625,110.15 94.275,110.15 94.925,110.15
+3V3: C3_3.3V.2 C4_3.3V.2 C5_3.3V.2 C6_3.3V.2 J4.5 J4.6 J4.7 J4.8 L1_3.3V.2 L2_3.3V.2 R2.2 R5_3.3V.2 U1_3.3V.A4 | length 5.6
  Top Layer w0.25: U1_3.3V.A4 118.664,93.5 119.189,94.025 119.714,94.025 119.939,94.25 L1_3.3V.2 ; R5_3.3V.2 121.5,90.975 121.725,91.2 R2.2
  other v1: 119.739,86.675 120.389,86.675 121.039,86.675 121.689,86.675 122.339,86.675 122.989,86.675 123.639,86.675 124.289,86.675 124.939,86.675 125.589,86.675 126.889,86.675 128.189,86.675 119.739,87.325 120.389,87.325 121.039,87.325 123.889,87.325 121.289,87.925 123.889,87.975 126.889,87.975 128.189,87.975 126.889,89.275 128.189,89.275 121.652,91.048 128.5,91.05 128.975,91.45 128.5,91.85 128.975,92.25 128.5,92.65 128.975,93.05 128.5,93.45 126.889,95.225 128.189,95.225 123.889,96.525 126.889,96.525 128.189,96.525 121.289,96.575 119.739,97.175 120.389,97.175 121.039,97.175 123.889,97.175 119.739,97.825 120.389,97.825 121.039,97.825 121.689,97.825 122.339,97.825 122.989,97.825 123.639,97.825 124.289,97.825 124.939,97.825 125.589,97.825 126.889,97.825 128.189,97.825
+5V: C3_5V.2 C4_5V.2 C5_5V.2 C6_5V.2 J1.5 J1.6 J1.7 J1.8 L1_5V.2 L2_5V.2 R1.2 R5_5V.2 U1_5V.A4 | length 5.7
  Top Layer w0.25: U1_5V.A4 118.675,105.775 119.2,106.3 119.725,106.3 119.95,106.525 L1_5V.2 ; R5_5V.2 121.525,103.25 121.75,103.475 R1.2
  other v1: 119.75,98.95 120.4,98.95 121.05,98.95 121.7,98.95 122.35,98.95 123,98.95 123.65,98.95 124.3,98.95 124.95,98.95 125.6,98.95 126.9,98.95 128.2,98.95 119.75,99.6 120.4,99.6 121.05,99.6 123.9,99.6 121.3,100.2 123.9,100.25 126.9,100.25 128.2,100.25 126.9,101.55 128.2,101.55 121.663,103.323 128.511,103.325 128.986,103.725 128.511,104.125 128.986,104.525 128.511,104.925 128.986,105.325 128.511,105.725 126.9,107.5 128.2,107.5 123.9,108.8 126.9,108.8 128.2,108.8 121.3,108.85 119.75,109.45 120.4,109.45 121.05,109.45 123.9,109.45 119.75,110.1 120.4,110.1 121.05,110.1 121.7,110.1 122.35,110.1 123,110.1 123.65,110.1 124.3,110.1 124.95,110.1 125.6,110.1 126.9,110.1 128.2,110.1
DVDT: C12.2 U2.7 | length 1.1
  Top Layer w0.25: C12.2 105.46,94.405 105.705,94.65 U2.7@106.375,94.65
GND: C1_1.8V.1 C1_2.5V.1 C1_3.3V.1 C1_5V.1 C2_1.8V.1 C2_2.5V.1 C2_3.3V.1 C2_5V.1 C3_1.8V.1 C3_2.5V.1 C3_3.3V.1 C3_5V.1 C4_1.8V.1 C4_2.5V.1 C4_3.3V.1 C4_5V.1 C5_1.8V.1 C5_2.5V.1 C5_3.3V.1 C5_5V.1 C6_1.8V.1 C6_2.5V.1 C6_3.3V.1 C6_5V.1 C7_1.8V.1 C7_2.5V.1 C7_3.3V.1 C7_5V.1 C8.2 C9.2 C10.1 C11.1 C12.1 J1.1 J1.2 J1.3 J1.4 J1.SHLD J2.2 J3.1 J3.2 J3.3 J3.4 J3.SHLD J4.1 J4.2 J4.3 J4.4 J4.SHLD J5.1 J5.2 J5.3 J5.4 J5.SHLD J6.1 J6.2 J6.3 J6.4 J6.SHLD R6_1.8V.1 R6_2.5V.1 R6_3.3V.1 R6_5V.1 R10.1 R11.1 R13.1 U1_1.8V.A3 U1_1.8V.B3 U1_1.8V.C3 U1_1.8V.C4 U1_1.8V.D3 U1_1.8V.E3 U1_1.8V.F3 U1_2.5V.A3 U1_2.5V.B3 U1_2.5V.C3 U1_2.5V.C4 U1_2.5V.D3 U1_2.5V.E3 U1_2.5V.F3 U1_3.3V.A3 U1_3.3V.B3 U1_3.3V.C3 U1_3.3V.C4 U1_3.3V.D3 U1_3.3V.E3 U1_3.3V.F3 U1_5V.A3 U1_5V.B3 U1_5V.C3 U1_5V.C4 U1_5V.D3 U1_5V.E3 U1_5V.F3 U2.8 | length 22.9
  Top Layer w0.25: C12.1 105.378,93.473 106.097,93.473 v1(106.125,93.5) R11.1 107.025,93.775 U2.8 ; R10.1 v1(108.075,98.875) ; v1(108.55,93.45) 108.552,93.448 109.172,93.448 C11.1
  Bottom Layer w0.25: J6.SHLD@86.55,90.37 J6.SHLD@88.95,90.37 ; J6.SHLD@86.55,94.38 J6.SHLD@88.95,94.38 ; J5.SHLD@86.55,102.57 J5.SHLD@88.95,102.57 ; J5.SHLD@86.55,106.58 J5.SHLD@88.95,106.58 ; J4.SHLD@125.65,90.245 J4.SHLD@128.05,90.245 ; J4.SHLD@125.65,94.255 J4.SHLD@128.05,94.255 ; J1.SHLD@125.661,102.52 J1.SHLD@128.061,102.52 ; J1.SHLD@125.661,106.53 J1.SHLD@128.061,106.53
  other v1: 120.25,83.75 121.25,83.75 122.25,83.75 123.25,83.75 124.25,83.75 125.25,83.75 126.25,83.75 88,83.875 89,83.875 90,83.875 91,83.875 92,83.875 93,83.875 94,83.875 95,83.875 96,83.875 97,83.875 98,83.875 99,83.875 100,83.875 101,83.875 102,83.875 103.3,84.085 106.35,84.085 108.2,84.085 111.25,84.085 121.1,84.625 103.3,84.735 106.35,84.735 108.2,84.735 111.25,84.735 122.25,84.75 123.25,84.75 124.25,84.75 125.25,84.75 126.25,84.75 89,84.875 90,84.875 91,84.875 92,84.875 93,84.875 94,84.875 95,84.875 96,84.875 97,84.875 98,84.875 99,84.875 100,84.875 101,84.875 102,84.875 103.3,85.385 106.35,85.385 108.2,85.385 111.25,85.385 121.9,85.425 123.25,85.75 124.25,85.75 125.25,85.75 126.25,85.75 86,85.875 88,85.875 89,85.875 90,85.875 91,85.875 92,85.875 93,85.875 94,85.875 95,85.875 96,85.875 97,85.875 98,85.875 99,85.875 100,85.875 101,85.875 102,85.875 104.175,86.285 104.825,86.285 105.475,86.285 109.075,86.285 109.725,86.285 110.375,86.285 99,86.875 100,86.875 101,86.875 102,86.875 103,87 104,87 105,87 106,87 107,87 108,87 109,87 110,87 111,87 117.264,87.45 117.914,87.45 96.736,87.575 97.386,87.575 98.036,87.575 116.089,87.875 118.389,87.875 114.164,87.925 114.814,87.925 115.464,87.925 96.211,88 98.536,88 103,88 104,88 105,88 106,88 107,88 108,88 109,88 110,88 111,88 99.111,88.05 99.761,88.05 100.411,88.05 113.689,88.425 100.911,88.525 116.075,88.525 118.425,88.525 96.175,88.65 98.536,88.65 121.414,89 113.689,89.075 93.186,89.125 100.911,89.175 116.075,89.175 118.425,89.175 123.889,89.175 96.175,89.3 98.536,89.3 119.614,89.6 120.214,89.6 120.814,89.6 90.711,89.65 121.414,89.65 94.111,89.7 95.2,89.7 113.689,89.725 93.186,89.775 100.911,89.825 116.089,89.825 118.389,89.825 123.889,89.825 96.211,89.95 98.536,89.95 119.614,90.25 120.214,90.25 120.814,90.25 90.711,90.3 94.111,90.3 121.414,90.3 116.164,90.4 93.186,90.425 118.389,90.425 98.461,90.5 96.211,90.525 93.811,90.825 122.614,90.85 123.264,90.85 92.675,90.875 91.375,90.9 92.025,90.9 125.2,91.05 89.4,91.175 123.125,91.45 124.725,91.45 89.875,91.575 91.475,91.575 125.2,91.85 89.4,91.975 95.775,92.025 124.725,92.25 89.875,92.375 118.825,92.6 125.2,92.65 89.4,92.775 123.125,93.05 124.725,93.05 89.875,93.175 91.475,93.175 125.2,93.45 89.4,93.575 122.575,93.725 123.225,93.725 121.925,93.75 91.336,93.775 91.986,93.775 120.789,93.8 118.389,94.1 116.139,94.125 95.611,94.2 96.211,94.2 121.414,94.2 98.436,94.225 93.186,94.325 120.489,94.325 123.889,94.325 93.786,94.375 94.386,94.375 94.986,94.375 118.964,94.65 116.064,94.675 118.389,94.675 90.711,94.8 96.211,94.8 98.511,94.8 113.689,94.8 121.414,94.85 100.911,94.9 120.489,94.925 93.186,94.975 123.889,94.975 93.786,95.025 94.386,95.025 94.986,95.025 95.611,95.025 116.064,95.325 118.425,95.325 90.711,95.45 96.175,95.45 98.525,95.45 113.689,95.45 121.414,95.5 100.911,95.55 93.186,95.625 116.064,95.975 118.425,95.975 96.175,96.1 98.525,96.1 113.689,96.1 100.911,96.2 114.189,96.575 114.839,96.575 115.489,96.575 116.064,96.625 118.389,96.625 99.136,96.7 99.786,96.7 100.436,96.7 96.211,96.75 98.511,96.75 116.564,97.05 117.214,97.05 117.864,97.05 96.686,97.175 97.336,97.175 97.986,97.175 116.625,99.725 117.275,99.725 117.925,99.725 96.8,99.775 97.45,99.775 98.1,99.775 116.1,100.15 118.4,100.15 96.275,100.2 98.6,100.2 114.175,100.2 114.825,100.2 115.475,100.2 99.175,100.25 99.825,100.25 100.475,100.25 113.7,100.7 100.975,100.725 116.075,100.8 118.425,100.8 96.25,100.85 98.6,100.85 121.425,101.275 93.25,101.325 113.7,101.35 100.975,101.375 116.075,101.45 118.425,101.45 123.9,101.45 96.25,101.5 98.6,101.5 90.775,101.85 119.625,101.875 120.225,101.875 120.825,101.875 94.175,101.9 95.275,101.9 121.425,101.925 93.25,101.975 113.7,102 100.975,102.025 116.1,102.1 118.4,102.1 123.9,102.1 96.275,102.15 98.6,102.15 90.775,102.5 94.175,102.5 119.625,102.525 120.225,102.525 120.825,102.525 121.425,102.575 93.25,102.625 116.175,102.675 98.525,102.7 118.4,102.7 96.275,102.725 93.875,103.025 92.75,103.075 91.439,103.1 92.089,103.1 122.625,103.125 123.275,103.125 104.8,103.325 105.45,103.325 125.211,103.325 89.464,103.375 123.136,103.725 124.736,103.725 89.939,103.775 91.539,103.775 104.8,104.025 105.45,104.025 125.211,104.125 89.464,104.175 95.825,104.225 124.736,104.525 89.939,104.575 105.45,104.675 118.825,104.875 125.211,104.925 89.464,104.975 123.136,105.325 124.736,105.325 89.939,105.375 91.539,105.375 125.211,105.725 89.464,105.775 91.4,105.975 92.05,105.975 122.586,106 123.236,106 121.925,106.025 120.8,106.075 118.4,106.375 95.675,106.4 96.275,106.4 116.15,106.4 98.5,106.425 121.425,106.475 93.25,106.525 93.85,106.575 94.45,106.575 95.05,106.575 120.5,106.6 123.9,106.6 116.075,106.95 118.4,106.95 90.775,107 96.275,107 98.575,107 113.7,107.075 100.975,107.1 121.425,107.125 93.25,107.175 120.5,107.2 93.85,107.225 94.45,107.225 95.05,107.225 95.675,107.225 123.9,107.25 104.4,107.325 105.05,107.325 105.7,107.325 106.35,107.325 116.075,107.6 118.425,107.6 90.775,107.65 96.25,107.65 98.6,107.65 113.7,107.725 100.975,107.75 121.425,107.775 93.25,107.825 104,108.25 106.8,108.25 116.075,108.25 118.425,108.25 96.25,108.3 98.6,108.3 113.7,108.375 100.975,108.4 114.2,108.85 114.85,108.85 115.5,108.85 99.2,108.9 99.85,108.9 100.5,108.9 104,108.9 106.8,108.9 116.075,108.9 118.4,108.9 96.275,108.95 98.575,108.95 116.575,109.325 117.225,109.325 117.875,109.325 96.75,109.375 97.4,109.375 98.05,109.375 104,109.55 106.8,109.55 104,110.2 106.8,110.2 106.8,110.85 86,111 87,111 88,111 89,111 90,111 91,111 92,111 93,111 94,111 95,111 96,111 97,111 98,111 99,111 100,111 101,111 102,111 103,111 104,111 117,111 118,111 119,111 120,111 121,111 122,111 123,111 113.8,111.05 114.45,111.05 115.1,111.05 106.8,111.5 115.45,111.625 88,112 89,112 90,112 91,112 92,112 93,112 94,112 95,112 96,112 97,112 98,112 99,112 100,112 101,112 102,112 103,112 104,112 117,112 118,112 119,112 120,112 121,112 122,112 123,112 106.8,112.15 115.45,112.275 106.8,112.8 115.45,112.925 88,113 89,113 90,113 91,113 92,113 93,113 94,113 95,113 96,113 97,113 98,113 99,113 100,113 101,113 102,113 103,113 104,113 117,113 118,113 119,113 120,113 121,113 122,113 123,113 106.8,113.45 113.8,113.45 114.45,113.45 115.1,113.45
ILIM: R11.2 U2.9 | length 1.1
  Top Layer w0.25: U2.9 107.475,93.825 R11.2
ITIMER: C11.2 U2.10 | length 1.2
  Top Layer w0.25: U2.10@108.125,94.65 108.82,94.65 109.065,94.405 C11.2
NetD1_1: D1.1 R13.2 | length 1.5
  Top Layer w0.25: D1.1 R13.2
NetD1_2: D1.2 Q1.2 | length 3
  Top Layer w0.25: Q1.2 115.875,84.45 116.2,84.775 116.2,85.279 116.346,85.425 D1.2
NetQ1_1: Q1.1 R8.1 R12.2 | length 8.5
  Top Layer w0.25: R12.2 112.825,85.825 113.056,85.594 ; Q1.1 113.275,84.475 113.275,85.375 113.056,85.594 ; R8.1 116.375,86.3 115.95,85.875 113.4,85.875 113.119,85.594 113.056,85.594
NetR1_1: R1.1 R6_5V.2 U1_5V.B4 | length 4
  Top Layer w0.25: U1_5V.B4 118.398,105.423 118.821,105.423 119.297,105.9 120.175,105.9 R6_5V.2@120.725,105.35 ; R6_5V.2 R1.1
NetR2_1: R2.1 R6_3.3V.2 U1_3.3V.B4 | length 4
  Top Layer w0.25: U1_3.3V.B4 118.387,93.148 118.81,93.148 119.286,93.625 120.164,93.625 R6_3.3V.2@120.714,93.075 ; R6_3.3V.2 R2.1
NetR3_1: R3.1 R6_2.5V.2 U1_2.5V.B4 | length 4
  Top Layer w0.25: R3.1 93.9,103.8 94.5,103.2 95.378,103.2 95.854,103.677 96.277,103.677 U1_2.5V.B4
NetR4_1: R4.1 R6_1.8V.2 U1_1.8V.B4 | length 4.1
  Top Layer w0.25: R4.1@92.797,91.6 R6_1.8V.2 ; R6_1.8V.2@93.886,91.55 94.436,91 95.314,91 95.791,91.477 96.213,91.477 U1_1.8V.B4
NetR12_1: R12.1 U2.4 | length 12.8
  Top Layer w0.25: v1(106.05,97.3) 106.05,96.925 106.55,96.425 U2.4@106.55,96.275 ; v1(112.05,89.45) R12.1
  Bottom Layer w0.25: v1(106.05,97.3) 107.025,96.325 107.025,93.625 111.2,89.45 v1(112.05,89.45)
OVLO: R9.1 R10.2 U2.2 | length 2.2
  Top Layer w0.25: R10.2 R9.1 107.475,96.8 U2.2
"Power Good_1.8V": R5_1.8V.1 U1_1.8V.F4 | length 1.4
  Top Layer w0.25: R5_1.8V.1@95.011,93.625 95.555,93.625 95.582,93.652 96.334,93.652 U1_1.8V.F4
"Power Good_2.5V": R5_2.5V.1 U1_2.5V.F4 | length 1.4
  Top Layer w0.25: R5_2.5V.1@95.075,105.825 95.652,105.825 95.658,105.83 96.42,105.83 U1_2.5V.F4
  Top Layer w0.3: R5_2.5V.1 R5_2.5V.1@95.075,105.825
"Power Good_3.3V": R5_3.3V.1 U1_3.3V.F4 | length 1.4
  Top Layer w0.25: U1_3.3V.F4 118.246,90.993 119.007,90.993 119.015,91 R5_3.3V.1@119.589,91
"Power Good_5V": R5_5V.1 U1_5V.F4 | length 1.4
  Top Layer w0.25: U1_5V.F4 118.277,103.248 118.999,103.248 119.026,103.275 R5_5V.1@119.6,103.275
  Top Layer w0.3: R5_5V.1@119.6,103.275 R5_5V.1
SS/TR_1.8V: C7_1.8V.2 U1_1.8V.D4 | length 1.5
  Top Layer w0.25: C7_1.8V.2 95.061,92.58 96.137,92.58 96.182,92.625 U1_1.8V.D4
SS/TR_2.5V: C7_2.5V.2 U1_2.5V.D4 | length 1.5
  Top Layer w0.25: C7_2.5V.2 95.132,104.773 96.373,104.773 U1_2.5V.D4
SS/TR_3.3V: C7_3.3V.2 U1_3.3V.D4 | length 1.5
  Top Layer w0.25: U1_3.3V.D4 118.285,92.047 119.537,92.047 C7_3.3V.2
SS/TR_5V: C7_5V.2 U1_5V.D4 | length 1.5
  Top Layer w0.25: U1_5V.D4 118.43,104.275 118.474,104.32 119.55,104.32 C7_5V.2
SW1_1.8V: L1_1.8V.1 U1_1.8V.A2 U1_1.8V.B2 U1_1.8V.C2 | length 1
  Top Layer w0.3: U1_1.8V.A2 U1_1.8V.B2 U1_1.8V.C2
SW1_2.5V: L1_2.5V.1 U1_2.5V.A2 U1_2.5V.B2 U1_2.5V.C2 | length 1
  Top Layer w0.3: U1_2.5V.A2 U1_2.5V.B2 U1_2.5V.C2
SW1_3.3V: L1_3.3V.1 U1_3.3V.A2 U1_3.3V.B2 U1_3.3V.C2 | length 1
  Top Layer w0.3: U1_3.3V.C2 U1_3.3V.B2 U1_3.3V.A2
SW1_5V: L1_5V.1 U1_5V.A2 U1_5V.B2 U1_5V.C2 | length 1
  Top Layer w0.3: U1_5V.C2 U1_5V.B2 U1_5V.A2
SW2_1.8V: L2_1.8V.1 U1_1.8V.D2 U1_1.8V.E2 U1_1.8V.F2 | length 1
  Top Layer w0.3: U1_1.8V.D2 U1_1.8V.E2 U1_1.8V.F2
SW2_2.5V: L2_2.5V.1 U1_2.5V.D2 U1_2.5V.E2 U1_2.5V.F2 | length 1
  Top Layer w0.3: U1_2.5V.D2 U1_2.5V.E2 U1_2.5V.F2
SW2_3.3V: L2_3.3V.1 U1_3.3V.D2 U1_3.3V.E2 U1_3.3V.F2 | length 1
  Top Layer w0.3: U1_3.3V.F2 U1_3.3V.E2 U1_3.3V.D2
SW2_5V: L2_5V.1 U1_5V.D2 U1_5V.E2 U1_5V.F2 | length 1
  Top Layer w0.3: U1_5V.F2 U1_5V.E2 U1_5V.D2
UVLO: R7.1 R9.2 U2.1 | length 2.1
  Top Layer w0.25: U2.1@107.95,96.275 107.975,96.3 107.975,97.15 R9.2 108.088,97.262 109.137,97.262 R7.1
VCC: C1_1.8V.2 C1_2.5V.2 C1_3.3V.2 C1_5V.2 C2_1.8V.2 C2_2.5V.2 C2_3.3V.2 C2_5V.2 C8.1 C9.1 U1_1.8V.A1 U1_1.8V.B1 U1_1.8V.C1 U1_1.8V.D1 U1_1.8V.E1 U1_1.8V.E4 U1_1.8V.F1 U1_2.5V.A1 U1_2.5V.B1 U1_2.5V.C1 U1_2.5V.D1 U1_2.5V.E1 U1_2.5V.E4 U1_2.5V.F1 U1_3.3V.A1 U1_3.3V.B1 U1_3.3V.C1 U1_3.3V.D1 U1_3.3V.E1 U1_3.3V.E4 U1_3.3V.F1 U1_5V.A1 U1_5V.B1 U1_5V.C1 U1_5V.D1 U1_5V.E1 U1_5V.E4 U1_5V.F1 U2.6 | length 2.2
  Top Layer w0.25: v1(95.8,93.125) U1_1.8V.E4 ; v1(95.85,105.3) 95.875,105.325 U1_2.5V.E4 ; U1_3.3V.E4 118.769,91.5 v1(118.789,91.52) ; U1_5V.E4 v1(118.78,103.775)
  other v1: 104.175,89.415 104.825,89.415 105.475,89.415 109.075,89.415 109.725,89.415 110.375,89.415 103.3,90.325 106.35,90.325 108.2,90.325 111.25,90.425 112.7,90.625 113.4,90.625 101.2,90.75 101.9,90.75 103.3,90.975 106.35,90.975 108.2,90.975 111.25,90.975 112.7,91.275 113.4,91.275 101.2,91.4 101.9,91.4 116.075,91.55 103.3,91.625 106.35,91.625 108.2,91.625 111.25,91.625 98.525,91.675 112.7,91.925 113.4,91.925 101.2,92.05 101.9,92.05 113.975,92.25 114.675,92.25 115.375,92.25 116.075,92.25 98.525,92.375 99.225,92.375 99.925,92.375 100.625,92.375 102.875,92.525 103.525,92.525 104.175,92.525 104.825,92.525 105.475,92.525 109.075,92.525 109.725,92.525 110.375,92.525 111.025,92.525 112.7,92.575 113.4,92.575 101.2,92.7 101.9,92.7 116.075,92.95 98.525,93.075 102.875,93.175 103.525,93.175 104.175,93.175 110.375,93.175 111.025,93.175 112.7,93.225 113.4,93.225 101.2,93.35 101.9,93.35 102.875,93.825 103.525,93.825 104.175,93.825 110.375,93.825 111.025,93.825 112.7,93.875 113.4,93.875 101.2,94 101.9,94 102.875,94.475 103.525,94.475 104.175,94.475 110.375,94.475 111.025,94.475 112.575,95.25 102.1,95.3 103.1,95.3 112.575,96.25 102.1,96.3 103.1,96.3 111.575,97.25 112.575,97.25 102.1,97.3 103.1,97.3 111.575,98.25 112.575,98.25 102.1,98.3 103.1,98.3 111.575,99.25 112.575,99.25 102.1,99.3 103.1,99.3 111.575,100.25 112.575,100.25 102.1,100.3 103.1,100.3 111.575,101.25 112.575,101.25 102.1,101.3 103.1,101.3 111.575,102.25 103.1,102.3 112.711,102.9 113.411,102.9 101.264,102.95 101.964,102.95 111.575,103.25 103.1,103.3 112.711,103.55 113.411,103.55 101.264,103.6 101.964,103.6 116.086,103.825 98.589,103.875 112.711,104.2 113.411,104.2 101.264,104.25 101.964,104.25 111.575,104.25 103.1,104.3 113.986,104.525 114.686,104.525 115.386,104.525 116.086,104.525 98.589,104.575 99.289,104.575 99.989,104.575 100.689,104.575 112.711,104.85 113.411,104.85 101.264,104.9 101.964,104.9 116.086,105.225 111.575,105.25 98.589,105.275 103.1,105.3 112.711,105.5 113.411,105.5 101.264,105.55 101.964,105.55 112.711,106.15 113.411,106.15 101.264,106.2 101.964,106.2
VIN: C10.2 J2.1 J3.5 J3.6 J3.7 J3.8 Q1.3 R7.2 R8.2 U2.5 | length 13.5
  Top Layer w0.25: v1(113.5,87) 114.15,87 Q1.3 115.225,86.95 R8.2
  Bottom Layer w0.25: v1(110.65,96.45) 110.675,96.475 111.675,96.475 111.95,96.2 111.95,90.425 112.65,89.725 112.65,87.2 112.85,87 v1(113.5,87)
  other v1: 104.375,95.8 105.075,95.8 109.3,95.8 109.95,95.8 104.375,96.45 105.075,96.45 105.725,96.45 109.3,96.45 109.95,96.45 104.375,97.1 105.075,97.1 109.95,97.1 110.65,97.1 104.375,97.75 105.075,97.75 109.95,97.75 110.65,97.75 104.375,98.4 105.075,98.4 109.95,98.4 110.65,98.4 109.95,99.05 110.65,99.05 107.1,99.625 107.8,99.625 107.1,100.275 107.8,100.275 107.1,100.925 107.8,100.925 109.225,103.7 109.925,103.7 110.625,103.7 109.225,104.35 109.925,104.35 110.625,104.35 109.225,105 109.925,105 110.625,105 109.225,105.65 109.925,105.65 110.625,105.65 109.225,106.3 109.925,106.3 110.625,106.3 109.225,106.95 109.925,106.95 110.625,106.95 110.85,110.2 110.85,110.85 111.55,110.85 110.85,111.5 110.85,112.15 110.85,112.8
pads on no net: U2.3

## Polygon pours and split planes (outlines as drawn)
GND on Top Layer "NONET_L-01_P-001" (solid, remove dead copper, pour order 81): 81.825,115.9 135.775,115.9 135.775,80.65 81.825,80.65
VCC on Top Layer "NONET_L-01_P-001" (solid, remove dead copper, pour order 40): 102.925,88.975 110.925,88.975 111.5,89.55 111.5,95.3 102.3,95.3 102.3,89.6
VCC on Top Layer "NONET_L-01_P-001" (solid, remove dead copper, pour order 39): 113.3,106.525 111.45,106.525 111,106.075 111,93.875 113.3,93.875
VCC on Top Layer "NONET_L-01_P-001" (solid, remove dead copper, pour order 33): 101.35,106.575 101.989,106.575 103.425,106.575 103.9,106.1 103.9,94 101.35,94
+5V on Top Layer "NONET_L-01_P-001" (solid, pour order 29): 126.111,108.225 126.111,100.825 121.3,100.825 120.7,101.425 119.2,101.425 119.2,98.875 119.575,98.5 129.286,98.5 129.286,110.55 119.575,110.55 119.2,110.175 119.2,107.625 120.7,107.625 121.3,108.225
+3V3 on Top Layer "NONET_L-01_P-001" (solid, pour order 20): 126.1,95.95 126.1,88.55 121.289,88.55 120.689,89.15 119.189,89.15 119.189,86.6 119.564,86.225 129.275,86.225 129.275,98.275 119.564,98.275 119.189,97.9 119.189,95.35 120.689,95.35 121.289,95.95
+2V5 on Top Layer "NONET_L-01_P-001" (solid, pour order 19): 88.564,100.875 88.564,108.275 93.375,108.275 93.975,107.675 95.475,107.675 95.475,110.225 95.1,110.6 85.389,110.6 85.389,98.55 95.1,98.55 95.475,98.925 95.475,101.475 93.975,101.475 93.375,100.875
+1V8 on Top Layer "NONET_L-01_P-001" (solid, pour order 31): 88.5,88.675 88.5,96.075 93.311,96.075 93.911,95.475 95.411,95.475 95.411,98.025 95.036,98.4 85.325,98.4 85.325,86.35 95.036,86.35 95.411,86.725 95.411,89.275 93.911,89.275 93.311,88.675
VIN on Top Layer "NONET_L-01_P-001" (solid, remove dead copper, pour order 32): 104.3,99.3 106.394,99.3 106.5,99.406 106.5,101.5 108,103 108,113.617 108.179,113.796 108.226,113.75 113.25,113.75 113.25,111.422 111,109.172 111,96 110.5,95.5 104.25,95.5 104,95.75 104,99
VCC on Top Layer "NONET_L-01_P-001" (solid, remove dead copper, pour order 43): 98.925,102.575 98.925,102.825 98.7,103.05 97.913,103.037 97.775,103.175 97.775,105.975 97.913,106.112 98.8,106.1 98.925,106.225 98.925,106.575 102.4,106.575 102.4,102.575
VCC on Top Layer "NONET_L-01_P-001" (solid, remove dead copper, pour order 44): 98.861,90.375 98.861,90.625 98.636,90.85 97.849,90.837 97.711,90.975 97.711,93.775 97.849,93.912 98.736,93.9 98.861,94.025 98.861,94.375 102.5,94.375 102.5,90.375
SW2_1.8V on Top Layer "NONET_L-01_P-001" (solid, remove dead copper, pour order 64): 97.511,93.475 97.511,93.775 98.111,94.375 98.111,96.675 96.611,96.675 96.611,94.375 97.211,93.775 97.211,93.475
SW2_2.5V on Top Layer "NONET_L-01_P-001" (solid, remove dead copper, pour order 54): 97.575,105.675 97.575,105.975 98.175,106.575 98.175,108.875 96.675,108.875 96.675,106.575 97.275,105.975 97.275,105.675
SW1_1.8V on Top Layer "NONET_L-01_P-001" (solid, remove dead copper, pour order 72): 97.211,91.275 97.211,90.975 96.611,90.375 96.611,88.075 98.111,88.075 98.111,90.375 97.511,90.975 97.511,91.275
SW1_2.5V on Top Layer "NONET_L-01_P-001" (solid, remove dead copper, pour order 71): 97.275,103.475 97.275,103.175 96.675,102.575 96.675,100.275 98.175,100.275 98.175,102.575 97.575,103.175 97.575,103.475
SW2_3.3V on Top Layer "NONET_L-01_P-001" (solid, remove dead copper, pour order 50): 117.089,91.15 117.089,90.85 116.489,90.25 116.489,87.95 117.989,87.95 117.989,90.25 117.389,90.85 117.389,91.15
VCC on Top Layer "NONET_L-01_P-001" (solid, remove dead copper, pour order 42): 115.739,94.25 115.739,94 115.964,93.775 116.751,93.788 116.889,93.65 116.889,90.85 116.751,90.713 115.864,90.725 115.739,90.6 115.739,90.25 111.2,90.25 111.2,94.25
SW1_3.3V on Top Layer "NONET_L-01_P-001" (solid, remove dead copper, pour order 69): 117.389,93.35 117.389,93.65 117.989,94.25 117.989,96.55 116.489,96.55 116.489,94.25 117.089,93.65 117.089,93.35
SW1_5V on Top Layer "NONET_L-01_P-001" (solid, remove dead copper, pour order 65): 117.4,105.625 117.4,105.925 118,106.525 118,108.825 116.5,108.825 116.5,106.525 117.1,105.925 117.1,105.625
VCC on Top Layer "NONET_L-01_P-001" (solid, remove dead copper, pour order 41): 115.75,106.525 115.75,106.275 115.975,106.05 116.762,106.063 116.9,105.925 116.9,103.125 116.762,102.988 115.875,103 115.75,102.875 115.75,102.525 112.4,102.525 112.4,106.525
SW2_5V on Top Layer "NONET_L-01_P-001" (solid, remove dead copper, pour order 45): 117.1,103.425 117.1,103.125 116.5,102.525 116.5,100.225 118,100.225 118,102.525 117.4,103.125 117.4,103.425
VCC on Power "NONET_L-01_P-001" (solid, remove dead copper, pour order 80): 81.875,115.8 135.775,115.8 135.775,80.75 81.875,80.75
+1V8 on Power "NONET_L-01_P-001" (solid, pour order 68): 85.325,98.4 95.036,98.4 95.411,98.025 95.411,86.725 95.036,86.35 85.325,86.35
+2V5 on Power "NONET_L-01_P-001" (solid, pour order 73): 85.389,110.6 95.1,110.6 95.475,110.225 95.475,98.925 95.1,98.55 85.389,98.55
+3V3 on Power "NONET_L-01_P-001" (solid, pour order 76): 129.275,86.225 119.564,86.225 119.189,86.6 119.189,97.9 119.564,98.275 129.275,98.275
+5V on Power "NONET_L-01_P-001" (solid, pour order 77): 129.286,98.5 119.575,98.5 119.2,98.875 119.2,110.175 119.575,110.55 129.286,110.55
VIN on Power "NONET_L-01_P-001" (solid, remove dead copper, pour order 57): 108,102.65 108,113.617 108.179,113.796 108.226,113.75 113.25,113.75 113.25,111.422 111,109.172 111,96 110.5,95.5 104.25,95.5 104,95.75 104,98.65
GND on Bottom Layer "NONET_L-01_P-001" (solid, remove dead copper, pour order 82): 81.875,115.8 135.775,115.8 135.775,80.75 81.875,80.75
+5V on Bottom Layer "NONET_L-01_P-001" (solid, pour order 28): 126.111,108.225 126.111,100.825 121.3,100.825 120.7,101.425 119.2,101.425 119.2,98.875 119.575,98.5 129.286,98.5 129.286,110.55 119.575,110.55 119.2,110.175 119.2,107.625 120.7,107.625 121.3,108.225
+3V3 on Bottom Layer "NONET_L-01_P-001" (solid, pour order 61): 126.1,95.95 126.1,88.55 121.289,88.55 120.689,89.15 119.189,89.15 119.189,86.6 119.564,86.225 129.275,86.225 129.275,98.275 119.564,98.275 119.189,97.9 119.189,95.35 120.689,95.35 121.289,95.95
+2V5 on Bottom Layer "NONET_L-01_P-001" (solid, pour order 14): 88.564,100.875 88.564,108.275 93.375,108.275 93.975,107.675 95.475,107.675 95.475,110.225 95.1,110.6 85.389,110.6 85.389,98.55 95.1,98.55 95.475,98.925 95.475,101.475 93.975,101.475 93.375,100.875
+1V8 on Bottom Layer "NONET_L-01_P-001" (solid, pour order 79): 88.5,88.675 88.5,96.075 93.311,96.075 93.911,95.475 95.411,95.475 95.411,98.025 95.036,98.4 85.325,98.4 85.325,86.35 95.036,86.35 95.411,86.725 95.411,89.275 93.911,89.275 93.311,88.675
VIN on Bottom Layer "NONET_L-01_P-001" (solid, pour order 78): 108.15,106.225 108.8,106.225 108.8,106.975 108.15,106.975 108.15,113.75 113,113.75 113,111.5 111,109.5 111,96 110.5,95.5 108.15,95.5 108.15,102.225 108.8,102.225 108.8,102.975 108.15,102.975
no net on Bottom Overlay "NONET_L-01_P-001" (solid): 113.3,86.6 113.3,83.4 100.575,83.4 100.575,86.6
GND on GND "NONET_L-01_P-001" (solid, remove dead copper, pour order 70): 81.875,115.85 135.725,115.85 135.725,80.75 81.875,80.75

## Keep-outs
Top Layer:
  rectangle: 104.8,93 109.725,94.85
  rectangle: 105.573,96.873 108.748,98.727
  rectangle: 117.1,103.425 117.4,105.625

## Silkscreen, mask and mechanical layers (free items; w line width, h text height)
Top Overlay:
  text "-" at 103.286,108.053 h3
  text "+" at 111.514,108.053 h3
  text "10.8V - 13.2V" at 112.972,100.54 h1 r90
  text "Power" at 116.475,83.738 h1
Bottom Overlay:
  text "+VIN" at 108.987,107.379 h1.52
  text "+2V5" at 89.4,107.354 h1.52
  text "+5V" at 128.5,107.254 h1.52
  text "+1V8" at 89.4,95.154 h1.52
  text "+3V3" at 128.5,94.954 h1.52
  text "Copper Golem / V1.0 - 7/2023" at 110.131,86.75 h1.3
  text "S/N" at 113.303,86.583 h1.3
Board:
  circle w0.15: c127.975,84.475 r1
  circle w0.15: c127.975,112.5 r1
  circle w0.15: c86.625,112.5 r1
  circle w0.15: c86.625,84.475 r1
  lines w0.15: 129.475,84.475 cw(c127.975,84.475) 127.975,82.975 86.625,82.975 cw(c86.625,84.475) 85.125,84.475 85.125,112.5 cw(c86.625,112.5) 86.625,114 127.975,114 cw(c127.975,112.5) 129.475,112.5 129.475,84.471 ; 129.475,84.471 129.475,84.471

## Dimensions
86.625,82.975 to 86.625,114 on Board
85.125,84.475 to 129.475,84.471 on Board